# EAGLE board marquee-letter-template (EAGLE 9.5.2)

No outline drawn. Coordinates in mm, seen from the top.
Copper layers (1*16): Top 0.035mm / dielectric 1.5mm / Bottom 0.035mm
Design rules "default": minimum track width 16mil, minimum drill 0.8mm, track to track 0.8mm, track to pad 0.8mm, pad to pad 0.8mm, via to via 0.8mm, smd to smd 0mil, copper to edge 1mil, drill to drill 1mil, minimum pad ring 10mil, minimum via ring 10mil, stop-mask expansion 1mil, vias tented up to drill 30mil, thermal gap 10mil
Holes 3.3 mm at 35,67

## Footprints (pad centres in the part's own frame; a part is rotated, then mirrored left to right if it is on the bottom)
JST-PH-2-SMT-RA = smd 1 x 4.35: 1 1,-3.825; 2 -1,-3.825 | smd 1.6 x 3.15: NC1 -3.4,1.625; NC2 3.4,1.625

## Placement (x,y rotation side)
U$1  CONN_BATTERY-LIPO-HORIZ  [JST-PH-2-SMT-RA]  5,30 90 top
U$2  CONN_BATTERY-LIPO-HORIZ  [JST-PH-2-SMT-RA]  65,30 270 top

## Library data of the parts
U$1 U$2 = homemade-hardware

## Text on the board
tPlace: Dotted line is maximum PCB size / When you draw your "Dimension", / make sure it is smaller than this | One 3.3mm Hole / is required (anywhere) | One Power Connector / on each side of the PCB | One Power Connector / on each side of the PCB